# Altium PCB 多功能电子密码锁.PcbDoc
Units mil, origin at the board's own origin, x right, y up, seen from the top; angles counter-clockwise.
Board outline 2235 x 1074.25 mil, 2 copper layers (Top Layer, Bottom Layer); 42 components, 50 nets, 174 pads, 90 vias.
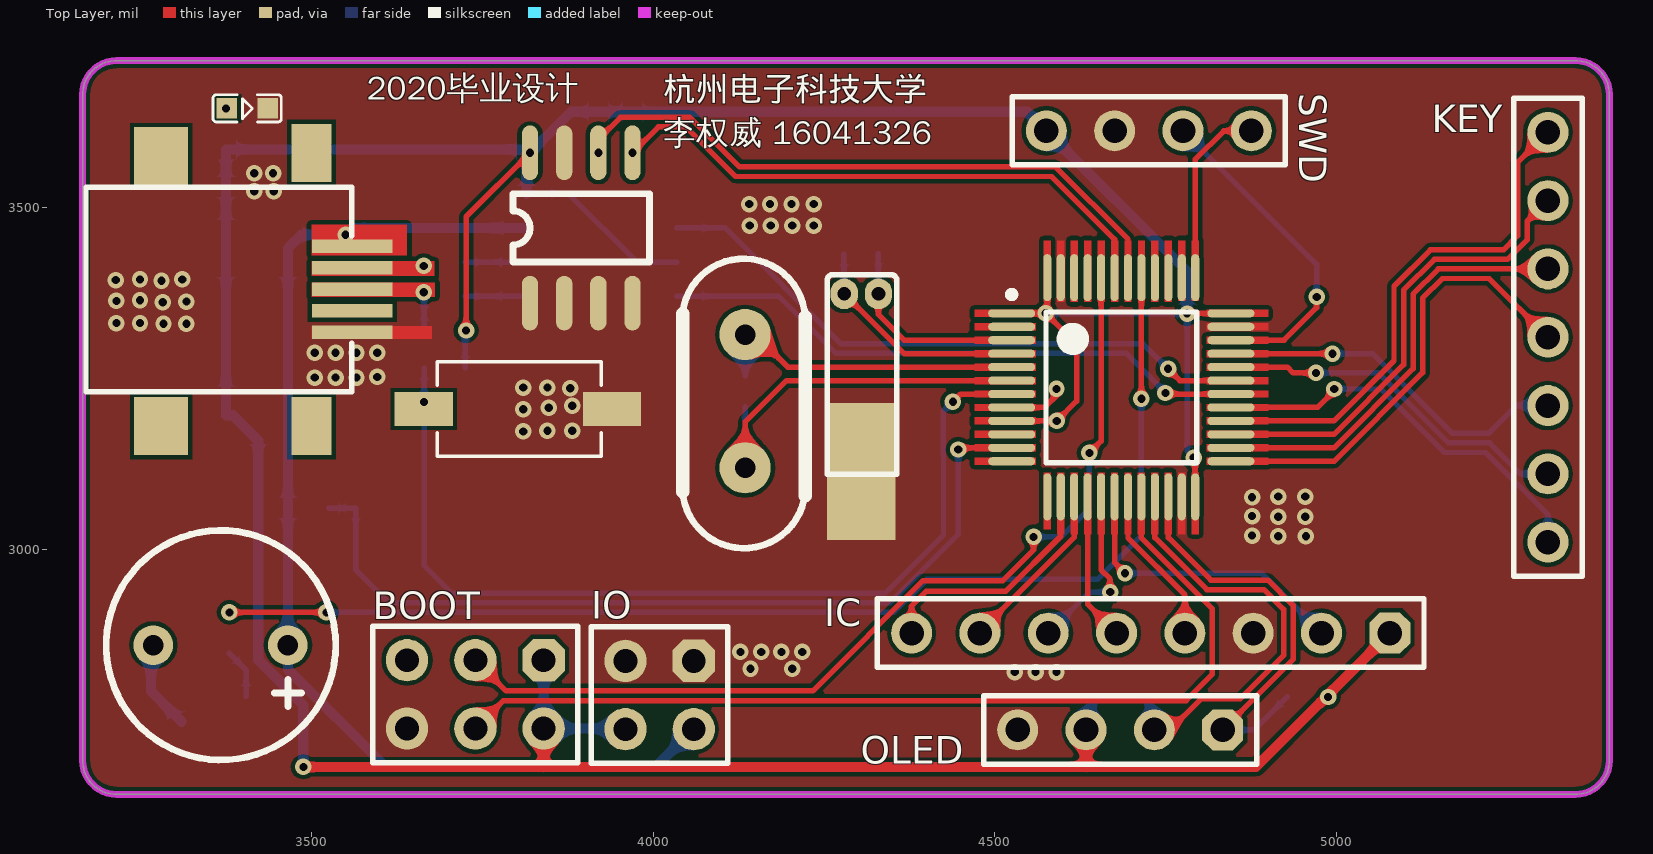
[diagram p0: Top Layer view]
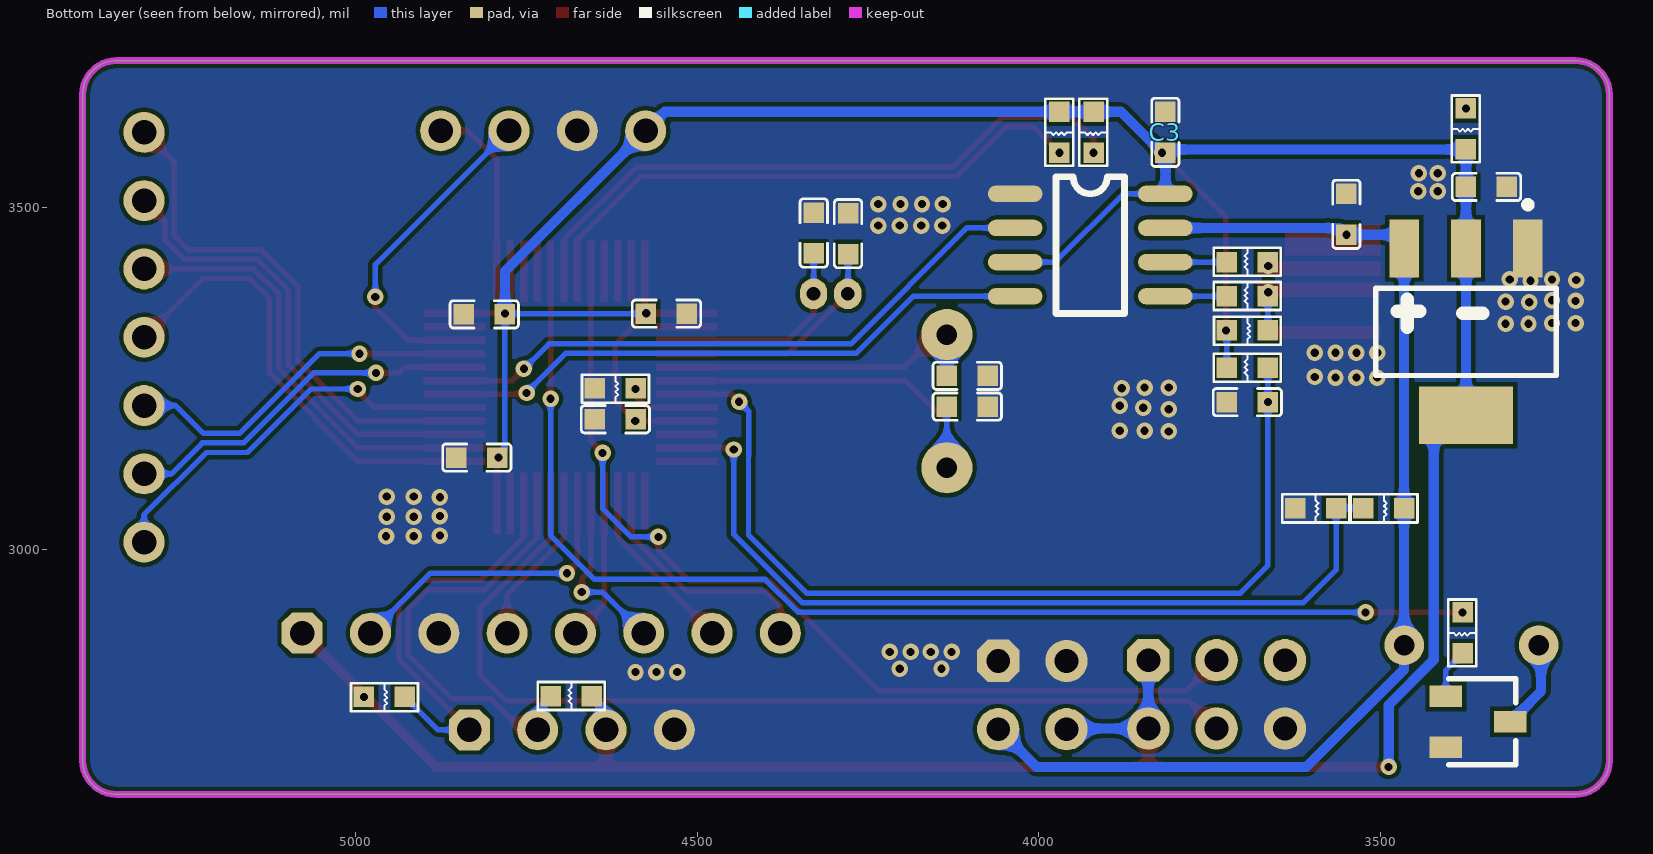
[diagram p1: Bottom Layer view, seen from below]
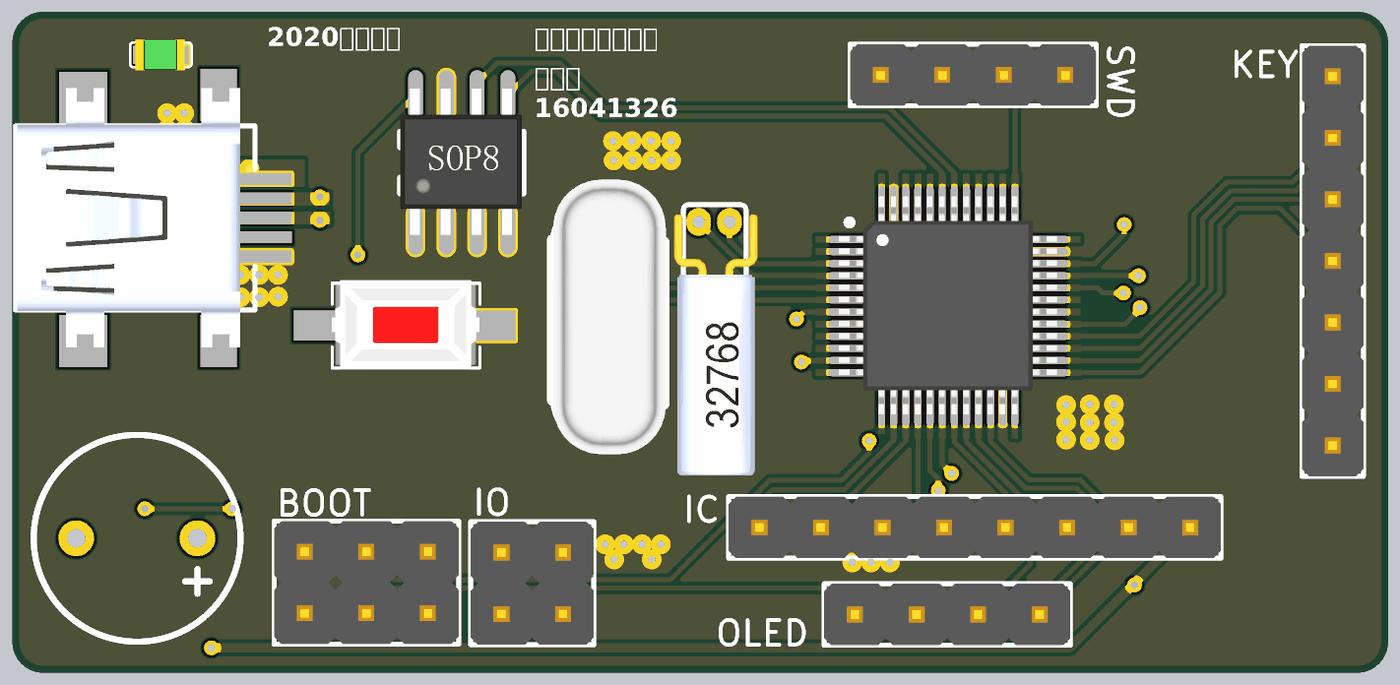
[diagram p2: 3D render of the assembled board from above, using the file's embedded part models]
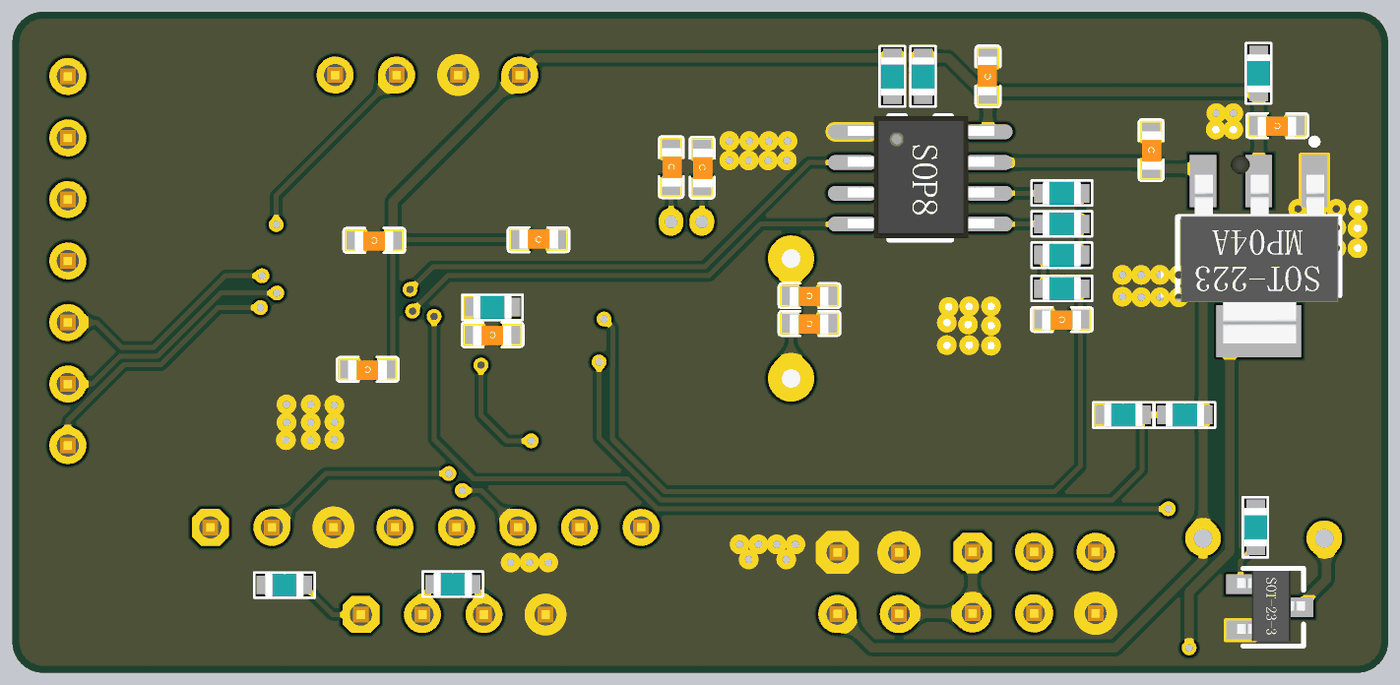
[diagram p3: 3D render of the assembled board from below, using the file's embedded part models]

## Layer stack, top to bottom
Top Solder: solder mask 0.4, Solder Resist, Dk 3.5
Top Layer: signal copper 1.4
Dielectric 1: dielectric 12.6, FR-4, Dk 4.8
Bottom Layer: signal copper 1.4
Bottom Solder: solder mask 0.4, Solder Resist, Dk 3.5

## Board outline
3165,2690.75 3165,3665 cw(c3215,3665) 3215,3715 5350,3715 cw(c5350,3665) 5400,3665 5400,2690.75 cw(c5350,2690.75) 5350,2640.75 3215,2640.75 cw(c3215,2690.75)

## Design rules (kind name [scope] priority, off if disabled: settings)
Clearance [All] p1: gap=6
ComponentClearance [All] p1 off: gap=10 collisioncheckmode=3 verticalgap=100000 showdistances=FALSE
Height [All] p1 off: minheight=0 maxheight=1000 prefheight=500
PlaneConnect [All] p1: planeconnectstyle=Direct reliefexpansion=20 reliefentries=4 reliefconductorwidth=10 reliefairgap=10
PolygonConnect [All] p1: connectstyle=Direct reliefconductorwidth=10 reliefentries=4 polygonreliefangle="90 Angle" airgapwidth=10
RoutingVias [All] p1: holewidth=12 width=24 viastyle="Through Hole" minholewidth=12 minwidth=24 maxholewidth=24 maxwidth=50
SolderMaskExpansion [All] p1: expansion=4
Width [All] p1: maxlimit=30 minlimit=8 preferedwidth=8
27 further rules are at their usual default settings.

## Classes and differential pairs
component class 多功能电子密码锁: BOOT KEY OLED SWD

## Components (designator, comment, footprint, x,y, rotation, side; value= is the part's Value field where it differs from the comment)
BOOT "header" header2X3 3840,2837.24 r180 top (schematic designator JP1)
C1 "100nF" 0603_C 3550,3490 r270 bottom
C2 "100nF" 0603_C 3345,3530 r0 bottom
C3 "100nF" 0603_C 3815,3610 r90 bottom
C4 "100nF" 0603_C 3695,3215 r0 bottom
C5 "20PF" 0603_C 4105,3253.5 r0 bottom
C6 "6PF" 0603_C 4329.72,3462.6 r270 bottom
C7 "20PF" 0603_C 4105,3208.5 r0 bottom
C8 "6PF" 0603_C 4279.53,3461.61 r270 bottom
C9 "100nF" 0603_C 4822.83,3133.86 r0 bottom
C10 "100nF" 0603_C 4812.01,3343.5 r0 bottom
C11 "100nF" 0603_C 4545.28,3344.49 r180 bottom
C12 "100nF" 0603_C 4620,3190 r0 bottom
D1 "LED1" 0603_LED 3405,3645 r0 top
IC "HEADER 8" HEADER8 5078.54,2876.97 r180 top (schematic designator JP3)
IO "Comment" HEADER2x2 4059.65,2836.22 r180 top
K1 "KEY" KEY_2 3664.41,3205 r180 top
KEY "header" header7 5310,3610 r270 top (schematic designator JP2)
LS1 "BUZI" SPEAK_SMALL 3465.55,2859.25 r90 top locked
OLED "header" header4#1 4833.86,2735.24 r180 top (schematic designator JP5)
Q1 "NPN2" SOT-23-3 3404.49,2784.65 r270 bottom
R1 "10k" RES_0603 3920,3580 r180 bottom
R2 "10k" RES_0603 3970,3580 r180 bottom
R3 "2k" RES_0603 3465,3060 r90 bottom
R4 "3k" RES_0603 3565,3060 r90 bottom
R5 "1k" RES_0603 3375,3585 r180 bottom
R6 "1k" RES_0603 3725,3265 r270 bottom
R7 "1K" RES_0603 3665,3320 r90 bottom
R8 "22" RES_0603 3725,3420 r270 bottom
R9 "22" RES_0603 3725,3370 r270 bottom
R10 "0" RES_0603 4590,3235 r90 bottom
R11 "33R" RES_0603 3380,2847.24 r180 bottom
R12 "1k" RES_0603 4714.57,2784.45 r270 bottom
R13 "1k" RES_0603 4928.15,2783.46 r90 bottom
SWD "header" header4#2 4875.79,3612.2 r180 top (schematic designator JP6)
U1 "USB_Mini_B" USB_MINI_B_SMD 3500,3380 r0 top locked
U2 "AMS1117" SOT-223 3363.66,3312.95 r0 bottom
U3 "24C02" SOP_8 3820,3360 r90 top
U4 "PL2303_8pin" SOP_8 4035,3520 r180 bottom
U5 "STM32F103C8T6" LQFP48 4685,3235 r0 top locked
Y1 "8M" XTAL_2 4134.84,3313.98 r270 top locked
Y2 "32768" XTAL_32 4280,3373.5 r270 top

## Footprints (in the part's own frame and the unit in brackets; to place one, negate y for a bottom-side part, rotate by r counter-clockwise, add the part's x,y. Pads: shape width x height; smd on the part's side, far side on the other; paste and mask are expansions set on the pad)
0603_C [mil] "Capacitor"
  rect 30x30 smd: 1(-30,0) 2(30,0)
  silkscreen extent -50,-20 50,20, body extent -51,-18 52,21, height 35
0603_LED [mil]
  rect 30x30 smd: 1(-29,0) 2(31,0)
  silkscreen extent -49,-20 51,20, body extent -40,-25 40,25, height 43
HEADER2x2 [mil]
  oct 62x62 hole 35: 1(0,0)
  round 62 hole 35: 2(0,100) 3(100,0) 4(100,100)
  silkscreen extent -50,-50 150,150, body extent -50,-50 150,150, height 398
header2X3 [mil]
  oct 62x62 hole 35: 1(0,0)
  round 62 hole 35: 2(0,100) 3(100,0) 4(100,100) 5(200,0) 6(200,100)
  silkscreen extent -50,-50 250,150, body extent -50,-50 250,150, height 398
header4#1 [mil]
  oct 60x60 hole 36: 1(0,0)
  round 60 hole 36: 2(100,0) 3(200,0) 4(300,0)
  silkscreen extent -50,-50 350,50, body extent -50,-50 350,50, height 398
header4#2 [mil]
  round 60 hole 36: 1(0,0) 2(100,0) 3(200,0) 4(300,0)
  silkscreen extent -50,-50 350,50, body extent -50,-50 350,50, height 398
header7 [mil]
  round 60 hole 36: 1(0,0) 2(100,0) 3(200,0) 4(300,0) 5(400,0) 6(500,0) 7(600,0)
  silkscreen extent -50,-50 650,50, body extent -50,-50 650,50, height 398
HEADER8 [mil]
  oct 60x60 hole 36 unplated: 1(0,0)
  round 60 hole 36 unplated: 2(100,0) 3(200,0) 4(300,0) 5(400,0) 6(500,0) 7(600,0) 8(700,0)
  silkscreen extent -50,-50 750,50, body extent -50,-50 750,50, height 398
KEY_2 [mil] "贴片"
  rect 85x49.37 smd: 1(0,0) 2(-275.59,0)
  silkscreen extent -260,-69 -20,69, body extent -260,-74 -19,72
LQFP48 [mm]
  oval 1.75x0.3 smd: 1(-4.064,2.794) 2(-4.064,2.294) 3(-4.064,1.794) 4(-4.064,1.294) 5(-4.064,0.794) 6(-4.064,0.294) 7(-4.064,-0.206) 8(-4.064,-0.706) 9(-4.064,-1.206) 10(-4.064,-1.706) 11(-4.064,-2.206) 12(-4.064,-2.706) 25(4.086,-2.706) 26(4.086,-2.206) 27(4.086,-1.706) 28(4.086,-1.206) 29(4.086,-0.706) 30(4.086,-0.206) 31(4.086,0.294) 32(4.086,0.794) 33(4.086,1.294) 34(4.086,1.794) 35(4.086,2.294) 36(4.086,2.794)
  oval 0.3x1.75 smd: 13(-2.739,-4.031) 14(-2.239,-4.031) 15(-1.739,-4.031) 16(-1.239,-4.031) 17(-0.739,-4.031) 18(-0.239,-4.031) 19(0.261,-4.031) 20(0.761,-4.031) 21(1.261,-4.031) 22(1.761,-4.031) 23(2.261,-4.031) 24(2.761,-4.031) 37(2.761,4.119) 38(2.261,4.119) 39(1.761,4.119) 40(1.261,4.119) 41(0.761,4.119) 42(0.261,4.119) 43(-0.239,4.119) 44(-0.739,4.119) 45(-1.239,4.119) 46(-1.739,4.119) 47(-2.239,4.119) 48(-2.739,4.119)
  silkscreen extent -4.19,-2.76 2.81,3.62, body extent -4.5,-4.44 4.5,4.56, height 1.56
RES_0603 [mil]
  rect 30x30 smd: 1(0,0) 2(0,60)
  silkscreen extent -21,-19 20,79, body extent -19,-1 18,61, height 34
SOP_8 [mil]
  oval 80x24 smd: 1(0,0) 2(0,-50) 3(0,-100) 4(0,-150) 5(220,-150) 6(220,-100) 7(220,-50) 8(220,0)
  silkscreen extent 60,-175 160,25, body extent -8,-173 230,25, height 63
SOT-23-3 [mm]
  rect 0.8x1.2 smd: 1(0,0) 2(1.9,0) 3(0.95,2.4)
  silkscreen extent -0.65,0.1 2.55,2.6, body extent -0.55,-0.14 2.35,2.66
SOT-223 [mm] "ASM1117系列"
  rect 1.1x2.15 smd: 1(-2.012,-3.227) 2(0.288,-3.227) 3(2.588,-3.227)
  rect 3.5x2.15 smd: 2(0.288,2.973)
  silkscreen extent -3.06,-4.98 3.64,1.5, body extent -3,-3.48 3.5,3.48, height 1.7
SPEAK_SMALL [mil]
  round 58 hole 30: 1(0,0) 2(0,197)
  silkscreen extent -168,-70 168,266
USB_MINI_B_SMD [mm]
  rect 3x0.5 smd: 1(1.516,1.6) 2(1.516,0.8) 3(1.516,0) 4(1.516,-0.8) 5(1.516,-1.6)
  rect 2x2.159 smd: ""(-5.588,-5.08) ""(-5.588,4.953)
  rect 1.5x2.159 smd: ""(0,-5.08) ""(0,5.08)
  silkscreen extent -8.38,-3.8 1.5,3.8, body extent -8.31,-5.35 0.89,5.35, height 3.95
XTAL_2 [mil]
  round 75 hole 30: 1(0,0) 2(195,0)
  silkscreen extent -111,-92 313,88, body extent -129,-91 318,92, height 138
XTAL_32 [mil]
  oval 45x40 hole 20: 1(0,0) 2(0,50)
  rect 200x100 smd: ""(260,25)
  silkscreen extent -28,-25 264,77, body extent -12,-40 412,96, height 126

## Part data
BOOT: library part "HEADER 3X2"
C1 C2 C3 C4 C5 C6 C7 C8 C9 C10 C11 C12: library part CAP, "Capacitor"
K1: library part KEY_2, "Switch"
KEY: library part "HEADER 7"
LS1: library part Bell, "Electrical Bell"
OLED SWD: library part "HEADER 4"
Q1: "贴片"
R1 R2 R3 R4 R5 R6 R7 R8 R9 R10 R12 R13: library part RES1
R11: library part RES, "Resistor"
U2: "3.3V电压转换器AMS1117"
U3: library part 24C**
U4: library part PL2303-8pin, "USBת232"
U5: "STM32 ARM-based 32-bit MCU with 64 Kbytes Flash, 48-pin LQFP, Industrial Temperature"
Y1 Y2: library part XTAL32

## Via types
v1: diameter 24, hole 12, Top Layer to Bottom Layer, 90 vias

## Nets (pads, with @x,y where several pads share a name; then routed paths per layer and width w, separated by ;. In a path a pad name is that pad's centre, name@x,y a point inside that pad or via, vN(x,y) a via of type N, cw(c..) or ccw(c..) an arc to the next point about the centre after c; other vN are vias at no path point)
3.3V: BOOT.1 BOOT.2 C2.2 C3.1 C9.1 C10.1 C11.1 C12.1 IC.1 IO.4 OLED.3 R1.2 R2.2 R5.1 R6.1 R7.2 R12.2 R13.2 SWD.4 U2.2 U3.8 U4.3 U4.8 U5.1 U5.9 U5.24 U5.36 U5.48 | length 6188.2
  Top Layer w8: v1(3726.38,3319.88) 3726.38,3486.38 v1(3820,3580) ; U5.9 v1(4591.02,3187.53) 4620.08,3216.59 4620.08,3299.92 v1(4575,3345) ; U5.1 v1(4575,3345) ; U5.48 4577.16,3347.16 v1(4575,3345) ; v1(4781.73,3344.65) 4781.73,3344.78 4781.96,3345.01 U5.36 ; v1(4791.34,3133.86) 4793.7,3131.5 U5.24
  Top Layer w15: v1(3488.19,2681.1) 3840,2681.1 ; BOOT.2 3840,2681.1 ; OLED.3 4633.86,2681.1 ; IC.1 4882.68,2681.1 4633.86,2681.1 ; 3840,2681.1 4633.86,2681.1
  Bottom Layer w8: R6.1 R7.2 ; U4.8 3876.65,3520 3976.65,3420 U4.3 ; C3.1@3815,3575 v1(3820,3580) ; v1(4575,3345) 4575.35,3344.65 v1(4781.73,3344.65) 4781.73,3143.47 v1(4791.34,3133.86) ; v1(4591.02,3187.53) C12.1@4591.54,3187.01 ; OLED.3 4633.86,2763.74 R12.2
  Bottom Layer w15: v1(3488.19,2681.1) 3488.19,2771.65 3421.99,2837.85 3421.99,3158.72 3384.8,3195.91 3375,3195.91 3375,3440 C2.2 R5.1 3815,3585 v1(3820,3580) 3880,3640 R1.2 R2.2 4547.99,3640 SWD.4 4781.73,3406.26 v1(4781.73,3344.65) ; U4.8 C3.1@3815,3575 ; BOOT.1 BOOT.2 3958.62,2737.24 IO.4
  other v1: 4988.15,2783.46
5V: C1.2 IO.2 LS1.1 R3.1 U1.1 U2.3 U4.7 | length 1646.3
  Bottom Layer w15: LS1.1@3465.55,2850.8 3465.55,2823.99 3608.44,2681.1 4003.86,2681.1 IO.2@4060,2737.24 ; LS1.1 U2.3 3485.55,3460 v1(3550,3460) 3560,3470 U4.7
AGND: R10.1 U5.8 | length 83.5
  Top Layer w8: U5.8 4573.35,3207.21 4590.55,3224.41 v1(4590.55,3234.45)
  Bottom Layer w8: R10.1 v1(4590.55,3234.45)
BOOT0: BOOT.3 U5.44 | length 1384.2
  Top Layer w8: BOOT.3 3784.92,2792.32 4234.14,2792.32 4395.56,2953.74 4512.08,2953.74 4557.09,2998.74 v1(4557.09,3017.72) ; v1(4638.78,3140.75) 4655.9,3157.87 U5.44
  Bottom Layer w8: v1(4557.09,3017.72) 4597.44,3017.72 4638.78,3059.06 v1(4638.78,3140.75)
BOOT1: BOOT.4 U5.20 | length 1414
  Top Layer w8: BOOT.4 3781,2778.24 4780.21,2778.24 4818.54,2816.57 4818.54,2912.87 4714.96,3016.46 U5.20
GND: BOOT.6 C1.1 C2.1 C3.2 C4.2 C5.1 C6.1 C7.1 C8.1 C9.2 C10.2 C11.2 C12.2 D1.2 IC.3 IO.1 IO.3 K1.2 OLED.4 Q1.2 R4.2 R10.2 SWD.3 U1.5 U2.1 U3.1 U3.2 U3.3 U3.4 U3.7 U4.1 U5.23 U5.35 U5.47 Y2.
  other v1: 4529.53,2819.88 4560.04,2819.88 4590.55,2819.88 4142.72,2824.8 4203.74,2824.8 4127.95,2849.41 4158.46,2849.41 4187.99,2849.41 4218.5,2849.41 4915.35,3018.7 4955.71,3018.7 4876.97,3019.68 4915.35,3047.24 4954.72,3047.24 4876.97,3048.23 4876.97,3075.79 4915.35,3076.77 4954.72,3076.77 3810.04,3172.24 3845.47,3173.23 3881.89,3173.23 3810.04,3204.72 3847.44,3206.69 3881.89,3209.65 3878.94,3235.24 3810.04,3236.22 3845.47,3236.22 3504.92,3250.98 3535.43,3250.98 3565.94,3250.98 3596.46,3251.97 3504.92,3287.4 3535.43,3287.4 3565.94,3287.4 3596.46,3287.4 3283.46,3329.72 3316.93,3329.72 3214.57,3330.71 3249.02,3330.71 3282.48,3361.22 3316.93,3362.2 3214.57,3363.19 3249.02,3364.17 3280.51,3392.72 3213.58,3393.7 3249.02,3394.68 3311.02,3394.68 4141.73,3473.43 4172.24,3473.43 4203.74,3473.43 4235.24,3473.43 4140.75,3504.92 4171.26,3504.92 4202.76,3504.92 4235.24,3504.92 3416.34,3523.62 3444.88,3523.62 3416.34,3550.2 3443.9,3550.2
NetD1_1: D1.1 R5.2
  other v1: 3375,3645
NetLS1_2: LS1.2 Q1.3 | length 118.6
  Bottom Layer w15: LS1.2@3265,2847.24 3265,2792.24 Q1.3
NetQ1_1: Q1.1 R11.1 | length 72.7
  Bottom Layer w8: R11.1 3404.49,2822.76 Q1.1
NetR8_1: R8.1 U4.6 | length 90
  Bottom Layer w8: R8.1 U4.6
NetR9_1: R9.1 U4.5 | length 90
  Bottom Layer w8: R9.1 U4.5
NRST: C4.1 K1.1 R6.2 U5.7 | length 1393.2
  Top Layer w8: v1(4438.98,3215.55) 4450.32,3226.9 U5.7
  Bottom Layer w8: R6.2 v1(3665,3215) 3665,2975.75 3705.5,2935.24 4339.77,2935.24 4425.2,3020.67 4425.2,3136.21 4424.85,3136.56 4424.85,3201.43 v1(4438.98,3215.55)
OSC32_IN: C6.2 U5.3 Y2.2 | length 300
  Top Layer w8: Y2.2 4330,3343.3 4367.66,3305.64 U5.3
  Bottom Layer w8: C6.2 4329.72,3373.78 Y2.2
OSC32_OUT: C8.2 U5.4 Y2.1 | length 339.6
  Top Layer w8: Y2.1 4367.55,3285.95 U5.4
  Bottom Layer w8: C8.2 4279.53,3373.98 Y2.1
OSC_IN: C5.2 U5.5 Y1.1 | length 490.8
  Top Layer w8: Y1.1@4135,3328.5 4197.24,3266.27 U5.5
  Bottom Layer w8: C5.2 Y1.1@4135,3328.5
OSC_OUT: C7.2 U5.6 Y1.2 | length 542.7
  Top Layer w8: Y1.2@4135,3133.5 4135,3186.18 4195.4,3246.58 U5.6
  Bottom Layer w8: Y1.2@4135,3133.5 C7.2
PA0-WKUP: U5.10
PA1: R3.2 R4.1 U5.11 | length 1277.2
  Top Layer w8: v1(4446.85,3145.67) 4449.34,3148.16 U5.11
  Bottom Layer w8: R3.2 R4.1 3565,2969.45 3613.2,2921.24 4346.45,2921.24 4446.85,3021.64 v1(4446.85,3145.67)
PA2: U5.12
PA3: U5.13
PA4: IC.8 U5.14 | length 358
  Top Layer w8: IC.8 4378.54,2916.93 4399.61,2937.99 4516.14,2937.99 4596.85,3018.7 U5.14
PA5: IC.7 U5.15 | length 256.5
  Top Layer w8: IC.7 4478.54,2879.13 4616.53,3017.12 U5.15
PA6: IC.5 U5.16 | length 216.9
  Top Layer w8: U5.16 4636.22,2919.29 IC.5
PA7: IC.6 U5.17 | length 275.2
  Top Layer w8: U5.17 4655.9,2969.59 4668.8,2956.69 4668.8,2929.63 4669.29,2930.12 v1(4669.29,2937.01)
  Bottom Layer w8: IC.6 4638.58,2937.01 v1(4669.29,2937.01)
PA8: KEY.7 U5.29 | length 593.5
  Top Layer w8: U5.29 4972.96,3207.21 4997.05,3231.3 v1(4997.05,3234.25)
  Bottom Layer w8: v1(4997.05,3234.25) 5065.6,3234.25 5158.56,3141.29 5218.94,3141.29 5310,3050.24 KEY.7
PA9: U4.4 U5.30 | length 866.9
  Top Layer w8: v1(4750,3228.35) 4751.45,3226.9 U5.30
  Bottom Layer w8: U4.4 4184.13,3370 4267.72,3286.42 4692.91,3286.42 v1@4748.03,3231.3
PA10: U4.2 U5.31 | length 903.4
  Top Layer w8: v1(4753.94,3263.78) 4771.13,3246.58 U5.31
  Bottom Layer w8: U4.2 4105.79,3470 4275.37,3300.42 4717.3,3300.42 v1(4753.94,3263.78)
PA11: KEY.6 U5.32 | length 528.9
  Top Layer w8: U5.32 4928.61,3266.27 4937.01,3257.87 v1(4970.47,3257.87)
  Bottom Layer w8: v1(4970.47,3257.87) 5061.78,3257.87 5164.36,3155.29 5224.74,3155.29 5270.04,3110 KEY.6
PA12: KEY.5 U5.33 | length 529.3
  Top Layer w8: U5.33 v1(4994.56,3285.95)
  Bottom Layer w8: v1(4994.56,3285.95) 5053.5,3285.95 5170.16,3169.29 5223.07,3169.29 5263.78,3210 KEY.5
PA15: U5.38
PB0: IC.2 U5.18 | length 442
  Top Layer w8: U5.18 4675.59,2979.92 v1(4690.94,2964.57)
  Bottom Layer w8: v1(4690.94,2964.57) 4890.94,2964.57 IC.2
PB1: IC.4 U5.19 | length 233.8
  Top Layer w8: U5.19 4695.27,3016.34 4778.54,2933.07 IC.4
PB3: U5.39
PB4: U5.40
PB5: R11.2 U5.41 | length 1758.8
  Top Layer w8: v1(3380,2907.24) v1(3521.89,2907.24) ; v1(4714.96,3219.88) U5.41
  Bottom Layer w8: v1(3521.89,2907.24) 4352.25,2907.24 4400.72,2955.71 4650.59,2955.71 4714.96,3020.08 v1(4714.96,3219.88)
PB6: R1.1 U3.6 U5.42 | length 938.5
  Top Layer w8: v1(3920,3580) 3920,3599.77 3952.12,3631.89 4054.13,3631.89 4126.75,3559.28 4589.46,3559.28 4695.27,3453.46 U5.42
PB7: R2.1 U3.5 U5.43 | length 845.6
  Top Layer w8: v1(3970,3580) 4007.89,3617.89 4048.33,3617.89 4120.95,3545.28 4583.66,3545.28 4675.59,3453.35 U5.43
PB8: U5.45
PB9: U5.46
PB10: OLED.2 R12.1 U5.21 | length 653.8
  Top Layer w8: OLED.2 4757,2735.24 4802.28,2780.51 4859.34,2780.51 4923.01,2844.18 4923.01,2911.64 4894.19,2940.45 4810.76,2940.45 4734.64,3016.57 U5.21 U5.21@4736.96,3073.99
  Bottom Layer w8: R12.1 4733.86,2765.16 OLED.2
PB11: OLED.1 R13.1 U5.22 | length 622.6
  Top Layer w8: U5.22 4754.33,3016.68 4816.56,2954.45 4899.99,2954.45 4937.01,2917.44 4937.01,2838.39 OLED.1
  Bottom Layer w8: OLED.1 4879.92,2735.24 R13.1
PB12: KEY.4 U5.25 | length 674.5
  Top Layer w8: U5.25 4996.92,3128.47 5126.65,3258.19 5126.65,3367.25 5155.4,3396 5224,3396 KEY.4
PB13: KEY.3 U5.26 | length 636.5
  Top Layer w8: U5.26 4996.81,3148.16 5112.65,3263.99 5112.65,3373.05 5149.6,3410 KEY.3
PB14: KEY.2 U5.27 | length 685.4
  Top Layer w8: U5.27 4996.7,3167.84 5098.65,3269.79 5098.65,3378.85 5143.8,3424 5250.77,3424 5279.75,3452.98 5279.75,3479.75 KEY.2
PB15: KEY.1 U5.28 | length 765.7
  Top Layer w8: U5.28 4996.58,3187.53 5084.65,3275.59 5084.65,3384.65 5138,3438 5244.97,3438 5265.75,3458.78 5265.75,3565.75 KEY.1
PC13: U5.2
SWCLK: SWD.1 U5.37 | length 273.2
  Top Layer w8: U5.37@4794.16,3397.64 U5.37 4793.7,3570.27 4835.63,3612.2 SWD.1
SWDIO: SWD.2 U5.34 | length 485.3
  Top Layer w8: U5.34 4923.75,3305.64 4971.46,3353.35 v1(4971.46,3369.09)
  Bottom Layer w8: SWD.2 4971.46,3416.54 v1(4971.46,3369.09)
USB_D+: R7.1 R9.2 U1.3 | length 56.2
  Bottom Layer w8: v1(3664.37,3375.98) 3665,3375.35 R9.2 R7.1
USB_D-: R8.2 U1.2
  other v1: 3664.37,3414.37
pads on no net: BOOT.5 U1. U1.4

## Polygon pours and split planes (outlines as drawn)
GND on Top Layer "GND_L01_P010" (solid, remove dead copper, pour order 10): 3215,2640.75 cw(c3215,2687.44) 3168.31,2687.44 3168.31,2784.45 3168.31,3668.31 cw(c3215,3668.31) 3215,3715 5350,3715 cw(c5350,3665) 5400,3665 5400,2690.75 cw(c5350,2690.75) 5350,2640.75
GND on Bottom Layer "GND_L02_P012" (solid, remove dead copper, pour order 12): 3215,2640.75 cw(c3215,2690.75) 3165,2690.75 3165,3665 cw(c3215,3665) 3215,3715 5350,3715 cw(c5350,3665) 5400,3665 5400,2690.75 cw(c5350,2690.75) 5350,2640.75 4426.18,2640.75

## Keep-outs
Keep-Out Layer:
  lines w10: 3165,2690.75 ccw(c3215,2690.75) 3215,2640.75 5350,2640.75 ccw(c5350,2690.75) 5400,2690.75 5400,2770 5400,2795 5400,3665 ccw(c5350,3665) 5350,3715 3240,3715 3215,3715 ccw(c3215,3665) 3165,3665 3165,2770 3165,2690.75

## Other copper
Top Layer:
  rectangle net USB_D+: 3499.76,3369.09 3681.1,3390.35
  rectangle net USB_D-: 3500,3400 3680.12,3421.26
  rectangle net 5V: 3500,3430 3640,3475
  rectangle net GND: 3500,3307.09 3676.18,3326.77
  rectangle net 3.3V: 4810.04,3339.57 4900.59,3350.39
  rectangle net GND: 4810.04,3319.88 4900.59,3330.71
  rectangle net SWDIO: 4810.04,3300.2 4900.59,3311.02
  rectangle net PA12: 4810.04,3280.51 4900.59,3291.34
  rectangle net PA11: 4810.04,3260.83 4900.59,3271.65
  rectangle net PA10: 4810.04,3241.14 4900.59,3251.97
  rectangle net PA9: 4810.04,3221.46 4900.59,3232.28
  rectangle net PA8: 4810.04,3201.77 4900.59,3212.6
  rectangle net PB15: 4810.04,3182.09 4900.59,3192.91
  rectangle net PB14: 4810.04,3162.4 4900.59,3173.23
  rectangle net PB13: 4810.04,3142.72 4900.59,3153.54
  rectangle net PB12: 4810.04,3123.03 4900.59,3133.86
  region net 3.3V: 4788.26,3112.13 4788.26,3021.58 4799.08,3021.58 4799.08,3112.13
  region net GND: 4768.57,3112.13 4768.57,3021.58 4779.4,3021.58 4779.4,3112.13
  region net PB11: 4748.89,3112.13 4748.89,3021.58 4759.71,3021.58 4759.71,3112.13
  region net BOOT1: 4709.52,3112.13 4709.52,3021.58 4720.34,3021.58 4720.34,3112.13
  region net PB10: 4729.2,3112.13 4729.2,3021.58 4740.03,3021.58 4740.03,3112.13
  region net PB0: 4670.15,3112.13 4670.15,3021.58 4680.97,3021.58 4680.97,3112.13
  region net PB1: 4689.83,3112.13 4689.83,3021.58 4700.66,3021.58 4700.66,3112.13
  region net PA7: 4650.46,3112.13 4650.46,3021.58 4661.29,3021.58 4661.29,3112.13
  region net PA6: 4630.78,3112.13 4630.78,3021.58 4641.6,3021.58 4641.6,3112.13
  region net PA5: 4611.09,3112.13 4611.09,3021.58 4621.92,3021.58 4621.92,3112.13
  region net PA4: 4591.41,3112.13 4591.41,3021.58 4602.23,3021.58 4602.23,3112.13
  region net PA3: 4571.72,3112.13 4571.72,3028.54 4582.55,3028.54 4582.55,3112.13
  region net PA2: 4560.82,3133.91 4470.27,3133.91 4470.27,3123.09 4560.82,3123.09
  region net PA1: 4560.82,3153.6 4470.27,3153.6 4470.27,3142.77 4560.82,3142.77
  region net PA0-WKUP: 4560.82,3173.28 4470.27,3173.28 4470.27,3162.46 4560.82,3162.46
  region net 3.3V: 4560.82,3192.97 4470.27,3192.97 4470.27,3182.14 4560.82,3182.14
  region net AGND: 4560.82,3212.65 4470.27,3212.65 4470.27,3201.83 4560.82,3201.83
  region net NRST: 4560.82,3232.34 4470.27,3232.34 4470.27,3221.51 4560.82,3221.51
  region net OSC_OUT: 4560.82,3252.02 4470.27,3252.02 4470.27,3241.2 4560.82,3241.2
  region net OSC_IN: 4560.82,3271.71 4470.27,3271.71 4470.27,3260.88 4560.82,3260.88
  region net OSC32_OUT: 4560.82,3291.39 4470.27,3291.39 4470.27,3280.57 4560.82,3280.57
  region net OSC32_IN: 4560.82,3311.08 4470.27,3311.08 4470.27,3300.25 4560.82,3300.25
  region net PC13: 4560.82,3330.76 4470.27,3330.76 4470.27,3319.94 4560.82,3319.94
  region net 3.3V: 4560.83,3350.44 4470.28,3350.44 4470.28,3339.61 4560.83,3339.61
  region net GND: 4602.29,3361.35 4602.29,3451.9 4591.46,3451.9 4591.46,3361.35
  region net 3.3V: 4582.6,3361.35 4582.6,3451.9 4571.78,3451.9 4571.78,3361.35
  region net PB9: 4621.97,3361.35 4621.97,3451.9 4611.15,3451.9 4611.15,3361.35
  region net PB8: 4641.66,3361.35 4641.66,3451.9 4630.83,3451.9 4630.83,3361.35
  region net BOOT0: 4661.34,3361.35 4661.34,3451.9 4650.52,3451.9 4650.52,3361.35
  region net PB7: 4681.03,3361.35 4681.03,3451.9 4670.2,3451.9 4670.2,3361.35
  region net PB6: 4700.71,3361.35 4700.71,3451.9 4689.89,3451.9 4689.89,3361.35
  region net PB5: 4720.4,3361.35 4720.4,3451.9 4709.57,3451.9 4709.57,3361.35
  region net PB4: 4740.08,3361.35 4740.08,3451.9 4729.26,3451.9 4729.26,3361.35
  region net PB3: 4759.77,3361.35 4759.77,3451.9 4748.94,3451.9 4748.94,3361.35
  region net PA15: 4779.45,3363.19 4779.45,3451.9 4768.63,3451.9 4768.63,3363.19
  region net SWCLK: 4799.21,3363.19 4799.21,3451.77 4788.39,3451.77 4788.39,3363.19

## Silkscreen, mask and mechanical layers (free items; w line width, h text height)
Top Overlay:
  text "2020毕业设计" at 3580.71,3645.67 h60
  text "杭州电子科技大学" at 4014.76,3644.68 h60
  text "李权威 16041326" at 4014.76,3580.71 h60